# Altium PCB USBPort-Slave-PCB.PcbDoc
Units mil, origin at the board's own origin, x right, y up, seen from the top; angles counter-clockwise.
Board outline not stored, 2 copper layers (Top Layer, Bottom Layer); 5 components, 0 nets, 18 pads, 0 vias.
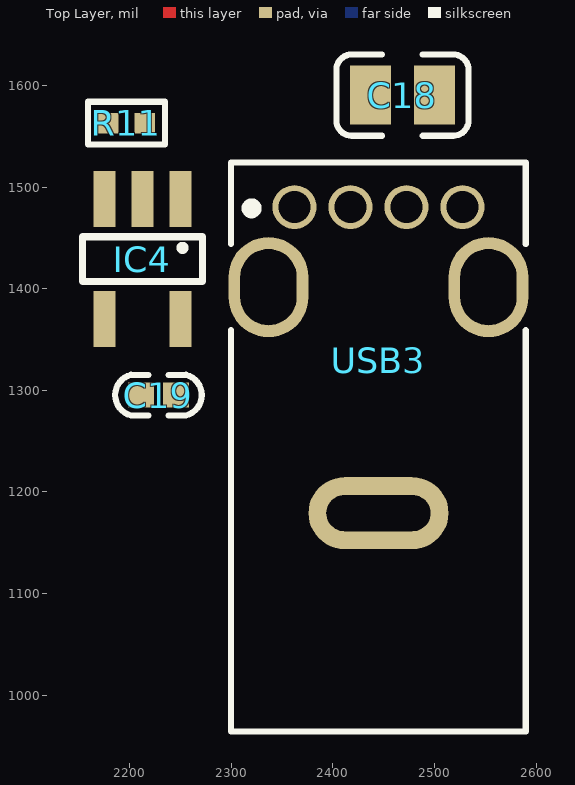
[diagram p0: Top Layer view]
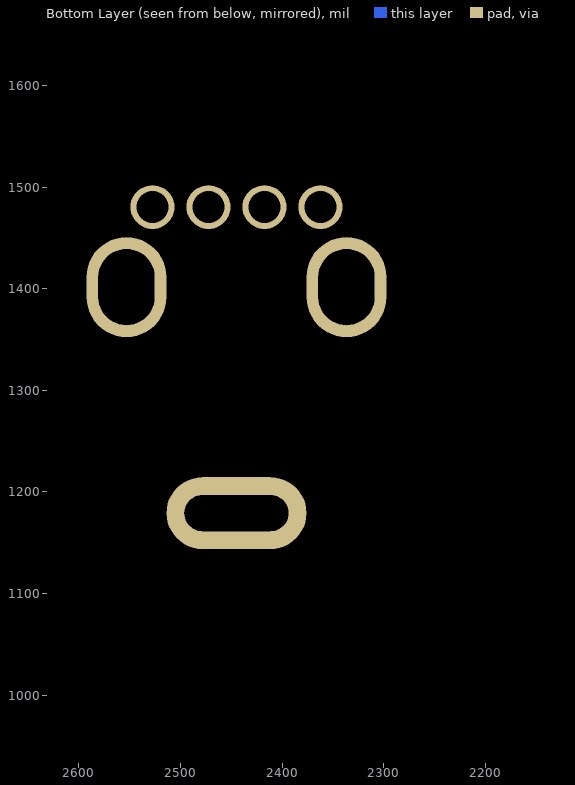
[diagram p1: Bottom Layer view, seen from below]

## Layer stack, top to bottom
Top Solder: solder mask 0.4, Solder Resist, Dk 3.5
Top Layer: signal copper 1.4
Dielectric 1: dielectric 12.6, FR-4, Dk 4.8
Bottom Layer: signal copper 1.4
Bottom Solder: solder mask 0.4, Solder Resist, Dk 3.5

## Components (designator, comment, footprint, x,y, rotation, side; value= is the part's Value field where it differs from the comment)
C18 "10uF 25V" 0805C 2468.5,1590.55 r0 top
C19 "1uF" 0402C 2228.35,1295.28 r0 top
IC4 "LPW5209AB5F" SOT23-5 2250,1488.19 r180 top
R11 "6.8k" 0402R 2196.85,1562.99 r180 top
USB3 "USB-A" USB-A/S_F 2362.2,1480.32 r0 top

## Footprints (in the part's own frame and the unit in brackets; to place one, negate y for a bottom-side part, rotate by r counter-clockwise, add the part's x,y. Pads: shape width x height; smd on the part's side, far side on the other; paste and mask are expansions set on the pad)
0402C [mm]
  rect 0.65x0.62 smd: 1(-0.44,0) 2(0.44,0)
  silkscreen extent -1.08,-0.51 1.08,0.51, body extent -0.51,-0.27 0.49,0.27, height 0.55
0402R [mil]
  rect 20x20 smd: 1(-18,0) 2(18,0)
  silkscreen extent -38,-21 38,21, body extent -20,-11 20,11, height 16
0805C [mm]
  rect 1.02x1.47 smd: 1(-0.8,0) 2(0.8,0)
  silkscreen extent -1.65,-1.02 1.65,1.02, body extent -1,-0.62 1,0.63, height 0.88
SOT23-5 [mm]
  rect 0.55x1.4 smd: 1(0,0) 2(0.95,0) 3(1.9,0) 4(1.9,3) 5(0,3)
  silkscreen extent -0.55,0.94 2.45,2.06, body extent -0.55,0.27 2.45,3.08, height 1.15
USB-A/S_F [mm]
  oval 2x2.5 hole 1.4 slot 1.9 at 90 deg: 0(-0.65,-2) 0(4.85,-2)
  oval 3.5x1.8 hole 0.9 slot 2.6 at 0 deg: 0(2.1,-7.65)
  round 1.1 hole 0.8: 1(4.2,0) 2(2.8,0) 3(1.4,0) 4(0,0)
  silkscreen extent -1.58,-13.11 5.78,1.11, body extent -1.53,-13.1 5.59,0.9, height 13.7

## Part data
C18: library part CAP, "无极性电容", Supplier Part Number=C59782
C19: library part CAP-NP
IC4: "USB 限流开关"
R11: library part RES
USB3: Supplier Part Number=C39416

## Nets (pads, with @x,y where several pads share a name; then routed paths per layer and width w, separated by ;. In a path a pad name is that pad's centre, name@x,y a point inside that pad or via, vN(x,y) a via of type N, cw(c..) or ccw(c..) an arc to the next point about the centre after c; other vN are vias at no path point)
pads on no net: C18.1 C18.2 C19.1 C19.2 IC4.1 IC4.2 IC4.3 IC4.4 IC4.5 R11.1 R11.2 USB3.0 USB3.1 USB3.2 USB3.3 USB3.4